# Altium PCB PCB.pcbdoc (part 1 of 2)
Units mm, origin at the board's own origin, x right, y up, seen from the top; angles counter-clockwise.
Board outline 290.83 x 119.38 mm, 2 copper layers (Top Layer, Bottom Layer); 91 components, 196 nets, 972 pads, 129 vias.
Unrouted connection lines stored in the file: 1.
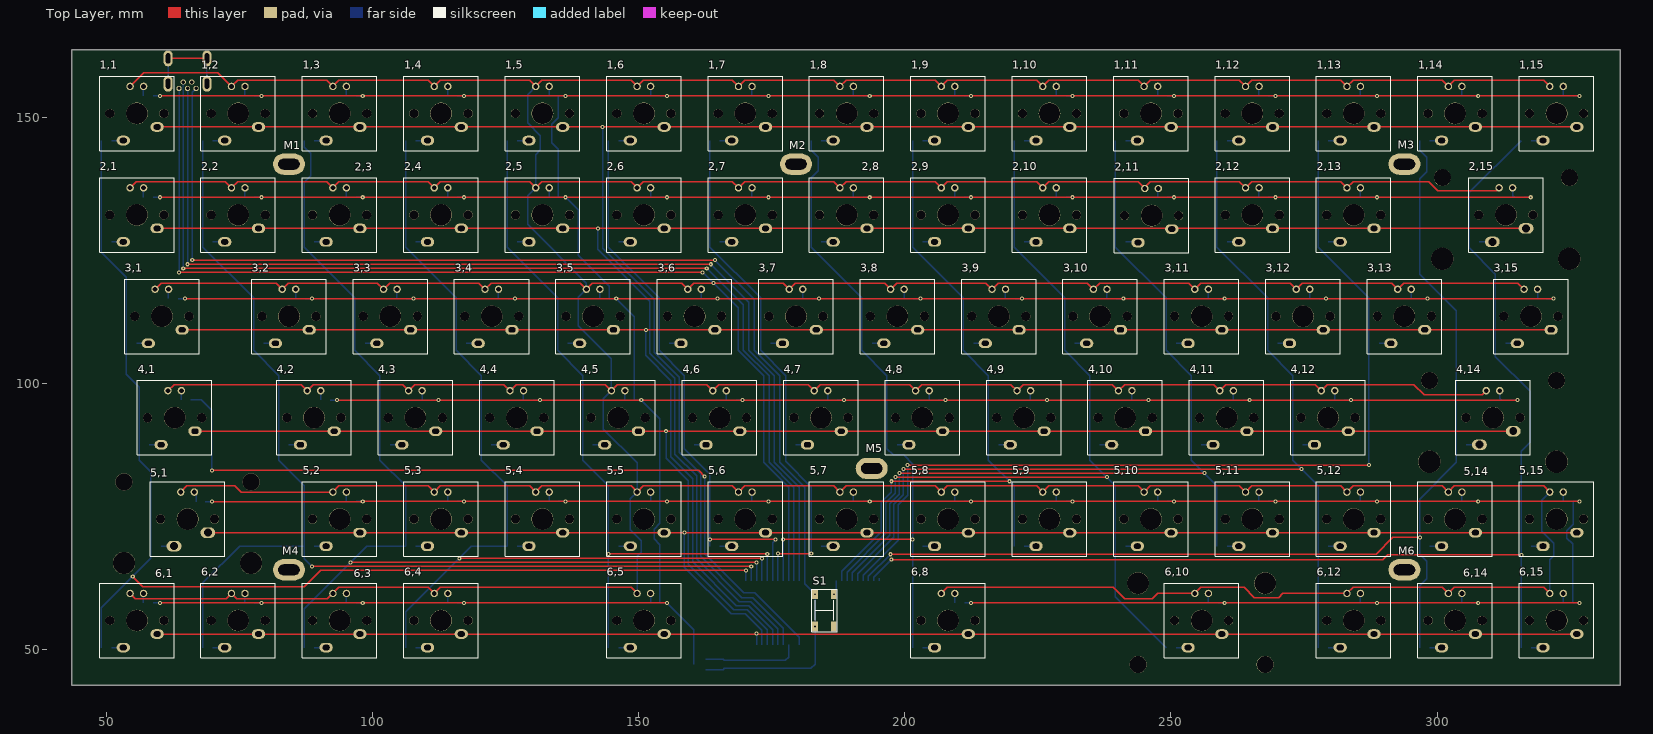
[diagram p0: Top Layer view]
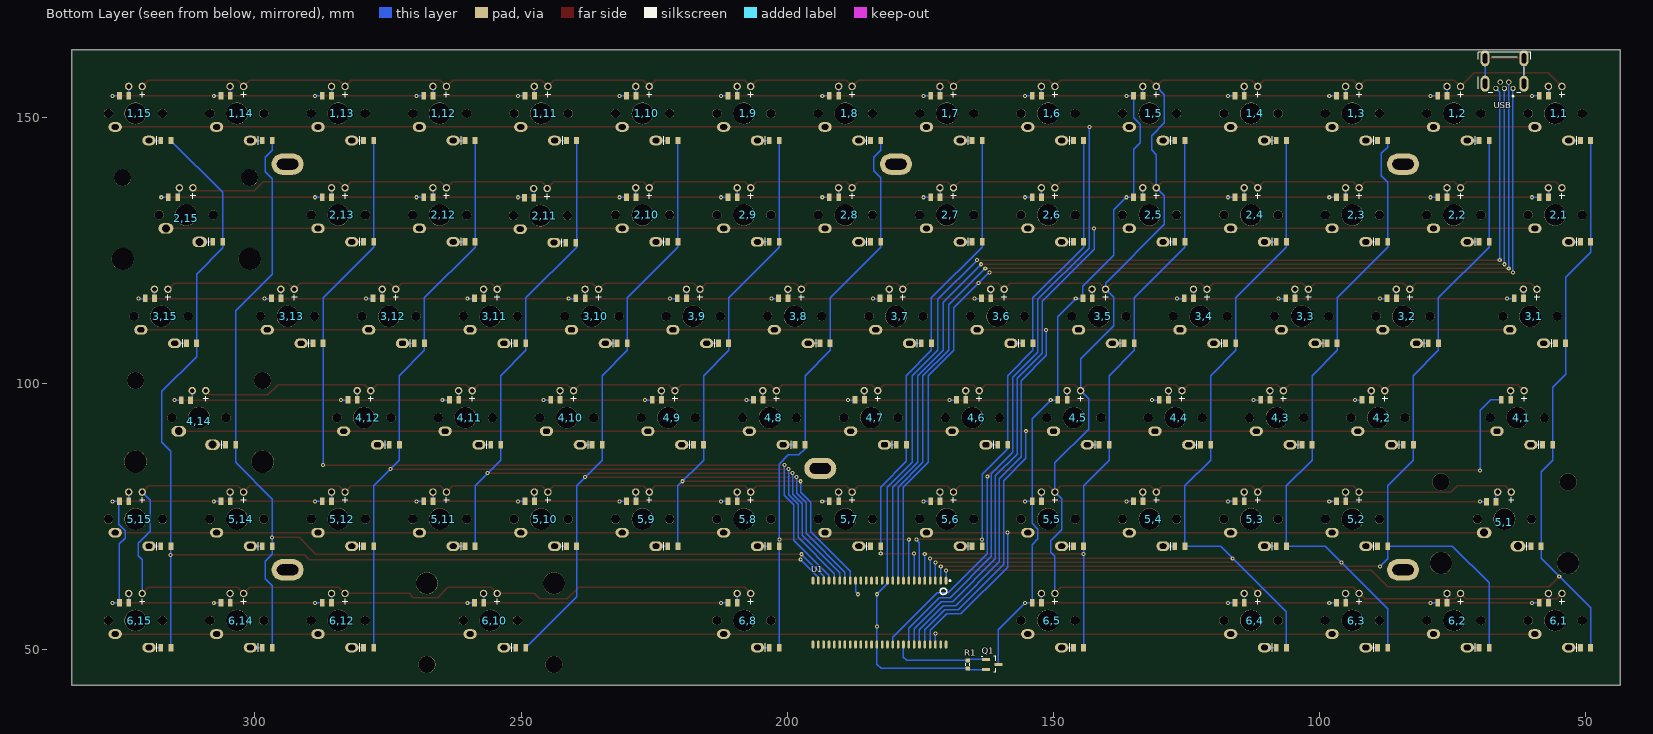
[diagram p1: Bottom Layer view, seen from below]

## Layer stack, top to bottom
Top Layer: signal copper 0.0356
Dielectric: dielectric 0.32, FR-4, Dk 4.8
Bottom Layer: signal copper 0.0356

## Board outline
43.561,162.687 43.561,43.307 334.391,43.307 334.391,162.687 43.561,162.687

## Design rules (kind name [scope] priority, off if disabled: settings)
Clearance [All] p1: gap=0.178
PolygonConnect [All] p1: connectstyle=Relief reliefconductorwidth=0.254 reliefentries=4 polygonreliefangle="90 Angle"
RoutingVias [All] p1: holewidth=0.711 width=1.27 viastyle="Through Hole" minholewidth=0.711 minwidth=1.27 maxholewidth=0.711 maxwidth=1.27
SilkscreenOverComponentPads [All] p1: minsilkscreentomaskgap=0.254
SolderMaskExpansion [All] p1: expansion=0.102
Width [All] p1: maxlimit=0.381 minlimit=0.203 preferedwidth=0.254
27 further rules are at their usual default settings.

## Components (designator, comment, footprint, x,y, rotation, side; value= is the part's Value field where it differs from the comment)
1,1 "Cherry MX Switch with diode" "Cherry MX Switch 2" 55.753,150.749 r0 top locked
1,2 "Cherry MX Switch with diode" "Cherry MX Switch 2" 74.803,150.749 r0 top locked
1,3 "Cherry MX Switch with diode" "Cherry MX Switch 2" 93.853,150.749 r0 top locked
1,4 "Cherry MX Switch with diode" "Cherry MX Switch 2" 112.903,150.749 r0 top locked
1,5 "Cherry MX Switch with diode" "Cherry MX Switch 2" 131.953,150.749 r0 top locked
1,6 "Cherry MX Switch with diode" "Cherry MX Switch 2" 151.003,150.749 r0 top locked
1,7 "Cherry MX Switch with diode" "Cherry MX Switch 2" 170.053,150.749 r0 top locked
1,8 "Cherry MX Switch with diode" "Cherry MX Switch 2" 189.103,150.749 r0 top locked
1,9 "Cherry MX Switch with diode" "Cherry MX Switch 2" 208.153,150.749 r0 top locked
1,10 "Cherry MX Switch with diode" "Cherry MX Switch 2" 227.203,150.749 r0 top locked
1,11 "Cherry MX Switch with diode" "Cherry MX Switch 2" 246.253,150.749 r0 top locked
1,12 "Cherry MX Switch with diode" "Cherry MX Switch 2" 265.303,150.749 r0 top locked
1,13 "Cherry MX Switch with diode" "Cherry MX Switch 2" 284.353,150.749 r0 top locked
1,14 "Cherry MX Switch with diode" "Cherry MX Switch 2" 303.403,150.749 r0 top locked
1,15 "Cherry MX Switch with diode" "Cherry MX Switch 2" 322.453,150.749 r0 top locked
2,1 "Cherry MX Switch with diode" "Cherry MX Switch 2" 55.753,131.699 r0 top locked
2,2 "Cherry MX Switch with diode" "Cherry MX Switch 2" 74.803,131.699 r0 top locked
2,3 "Cherry MX Switch with diode" "Cherry MX Switch 2" 93.853,131.699 r0 top locked
2,4 "Cherry MX Switch with diode" "Cherry MX Switch 2" 112.903,131.699 r0 top locked
2,5 "Cherry MX Switch with diode" "Cherry MX Switch 2" 131.953,131.699 r0 top locked
2,6 "Cherry MX Switch with diode" "Cherry MX Switch 2" 151.003,131.699 r0 top locked
2,7 "Cherry MX Switch with diode" "Cherry MX Switch 2" 170.053,131.699 r0 top locked
2,8 "Cherry MX Switch with diode" "Cherry MX Switch 2" 189.103,131.699 r0 top locked
2,9 "Cherry MX Switch with diode" "Cherry MX Switch 2" 208.153,131.699 r0 top locked
2,10 "Cherry MX Switch with diode" "Cherry MX Switch 2" 227.203,131.699 r0 top locked
2,11 "Cherry MX Switch with diode" "Cherry MX Switch 2" 246.38,131.572 r0 top locked
2,12 "Cherry MX Switch with diode" "Cherry MX Switch 2" 265.303,131.699 r0 top locked
2,13 "Cherry MX Switch with diode" "Cherry MX Switch 2" 284.353,131.699 r0 top locked
2,15 "Cherry MX Switch with diode" "Cherry MX Switch with s2" 312.928,131.699 r0 top locked
3,1 "Cherry MX Switch with diode" "Cherry MX Switch 2" 60.452,112.649 r0 top locked
3,2 "Cherry MX Switch with diode" "Cherry MX Switch 2" 84.328,112.649 r0 top locked
3,3 "Cherry MX Switch with diode" "Cherry MX Switch 2" 103.378,112.649 r0 top locked
3,4 "Cherry MX Switch with diode" "Cherry MX Switch 2" 122.428,112.649 r0 top locked
3,5 "Cherry MX Switch with diode" "Cherry MX Switch 2" 141.478,112.649 r0 top locked
3,6 "Cherry MX Switch with diode" "Cherry MX Switch 2" 160.528,112.649 r0 top locked
3,7 "Cherry MX Switch with diode" "Cherry MX Switch 2" 179.578,112.649 r0 top locked
3,8 "Cherry MX Switch with diode" "Cherry MX Switch 2" 198.628,112.649 r0 top locked
3,9 "Cherry MX Switch with diode" "Cherry MX Switch 2" 217.678,112.649 r0 top locked
3,10 "Cherry MX Switch with diode" "Cherry MX Switch 2" 236.728,112.649 r0 top locked
3,11 "Cherry MX Switch with diode" "Cherry MX Switch 2" 255.778,112.649 r0 top locked
3,12 "Cherry MX Switch with diode" "Cherry MX Switch 2" 274.828,112.649 r0 top locked
3,13 "Cherry MX Switch with diode" "Cherry MX Switch 2" 293.878,112.649 r0 top
3,15 "Cherry MX Switch with diode" "Cherry MX Switch 2" 317.627,112.649 r0 top
4,1 "Cherry MX Switch with diode" "Cherry MX Switch 2" 62.865,93.599 r0 top locked
4,2 "Cherry MX Switch with diode" "Cherry MX Switch 2" 89.027,93.599 r0 top locked
4,3 "Cherry MX Switch with diode" "Cherry MX Switch 2" 108.077,93.599 r0 top locked
4,4 "Cherry MX Switch with diode" "Cherry MX Switch 2" 127.127,93.599 r0 top locked
4,5 "Cherry MX Switch with diode" "Cherry MX Switch 2" 146.177,93.599 r0 top locked
4,6 "Cherry MX Switch with diode" "Cherry MX Switch 2" 165.227,93.599 r0 top locked
4,7 "Cherry MX Switch with diode" "Cherry MX Switch 2" 184.277,93.599 r0 top locked
4,8 "Cherry MX Switch with diode" "Cherry MX Switch 2" 203.327,93.599 r0 top locked
4,9 "Cherry MX Switch with diode" "Cherry MX Switch 2" 222.377,93.599 r0 top locked
4,10 "Cherry MX Switch with diode" "Cherry MX Switch 2" 241.427,93.599 r0 top locked
4,11 "Cherry MX Switch with diode" "Cherry MX Switch 2" 260.477,93.599 r0 top locked
4,12 "Cherry MX Switch with diode" "Cherry MX Switch 2" 279.527,93.599 r0 top locked
4,14 "Cherry MX Switch with diode" "Cherry MX Switch with s2" 310.515,93.599 r0 top locked
5,1 "Cherry MX Switch with diode" "Cherry MX Switch with s2" 65.278,74.549 r0 top locked
5,2 "Cherry MX Switch with diode" "Cherry MX Switch 2" 93.853,74.549 r0 top locked
5,3 "Cherry MX Switch with diode" "Cherry MX Switch 2" 112.903,74.549 r0 top locked
5,4 "Cherry MX Switch with diode" "Cherry MX Switch 2" 131.953,74.549 r0 top locked
5,5 "Cherry MX Switch with diode" "Cherry MX Switch 2" 151.003,74.549 r0 top locked
5,6 "Cherry MX Switch with diode" "Cherry MX Switch 2" 170.053,74.549 r0 top locked
5,7 "Cherry MX Switch with diode" "Cherry MX Switch 2" 189.103,74.549 r0 top locked
5,8 "Cherry MX Switch with diode" "Cherry MX Switch 2" 208.153,74.549 r0 top locked
5,9 "Cherry MX Switch with diode" "Cherry MX Switch 2" 227.203,74.549 r0 top locked
5,10 "Cherry MX Switch with diode" "Cherry MX Switch 2" 246.253,74.549 r0 top locked
5,11 "Cherry MX Switch with diode" "Cherry MX Switch 2" 265.303,74.549 r0 top locked
5,12 "Cherry MX Switch with diode" "Cherry MX Switch 2" 284.353,74.549 r0 top locked
5,14 "Cherry MX Switch with diode" "Cherry MX Switch 2" 303.403,74.549 r0 top locked
5,15 "Cherry MX Switch with diode" "Cherry MX Switch 2" 322.453,74.549 r0 top locked
6,1 "Cherry MX Switch with diode" "Cherry MX Switch 2" 55.753,55.499 r0 top locked
6,2 "Cherry MX Switch with diode" "Cherry MX Switch 2" 74.803,55.499 r0 top locked
6,3 "Cherry MX Switch with diode" "Cherry MX Switch 2" 93.853,55.499 r0 top locked
6,4 "Cherry MX Switch with diode" "Cherry MX Switch 2" 112.903,55.499 r0 top locked
6,5 "Cherry MX Switch with diode" "Cherry MX Switch 2" 151.003,55.499 r0 top locked
6,8 "Cherry MX Switch with diode" "Cherry MX Switch 2" 208.153,55.499 r0 top locked
6,10 "Cherry MX Switch with diode" "Cherry MX Switch 2" 255.778,55.499 r0 top locked
6,12 "Cherry MX Switch with diode" "Cherry MX Switch 2" 284.353,55.499 r0 top locked
6,14 "Cherry MX Switch with diode" "Cherry MX Switch 2" 303.403,55.499 r0 top locked
6,15 "Cherry MX Switch with diode" "Cherry MX Switch 2" 322.453,55.499 r0 top locked
M1 "M3" "M2 long" 84.328,141.224 r180 top
M2 "M3" "M2 long" 179.578,141.224 r180 top
M3 "M3" "M2 long" 293.878,141.224 r180 top
M4 "M3" "M2 long" 84.328,65.024 r180 top
M5 "M3" "M2 long" 193.802,84.074 r180 top
M6 "M3" "M2 long" 293.878,65.024 r180 top
Q1 "N7002" SOT23-2N7002 161.544,47.244 r270 bottom
R1 "Res1" RESC1608L[0603] 166.116,47.244 r270 bottom
S1 "SW-PB" "SW 4*4" 184.912,57.404 r270 top
U1 "Board_Kimera_Core" Board_Kimera_Core 170.18,62.992 r270 bottom locked
USB "USB_mini" USB_MINI 65.278,155.448 r0 bottom locked

## Footprints (in the part's own frame and the unit in brackets; to place one, negate y for a bottom-side part, rotate by r counter-clockwise, add the part's x,y. Pads: shape width x height; smd on the part's side, far side on the other; paste and mask are expansions set on the pad)
Board_Kimera_Core [mm] "Board_Kimera_Core"
  oval 1.5x0.5 smd: 1(0,0) 2(0,-1) 3(0,-2) 4(0,-3) 5(0,-4) 6(0,-5) 7(0,-6) 8(0,-7) 9(0,-8) 10(0,-9) 11(0,-10) 12(0,-11) 13(0,-12) 14(0,-13) 15(0,-14) 16(0,-15) 17(0,-16) 18(0,-17) 19(0,-18) 20(0,-19) 21(0,-20) 22(0,-21) 23(0,-22) 24(0,-23) 25(0,-24) 26(0,-25) 27(12,-25) 28(12,-24) 29(12,-23) 30(12,-22) 31(12,-21) 32(12,-20) 33(12,-19) 34(12,-17) 35(12,-18) 36(12,-16) 37(12,-15) 38(12,-14) 39(12,-13) 40(12,-12) 41(12,-11) 42(12,-10) 43(12,-9) 44(12,-8) 45(12,-7) 46(12,-6) 47(12,-5) 48(12,-4) 49(12,-3) 50(12,-2) 51(12,-1) 52(12,0)
  silkscreen extent -0.14,-1.11 2.61,0.88, body extent 0,-25.5 12,0.5, height 1
"Cherry MX Switch 2" [mm] "Cherry MX Switch"
  oval 2.5x1.8 hole 1 slot 1.3 at 0 deg: 1(3.81,-2.54) 5(-2.54,-5.08)
  rect 0.9x1.4 smd far side: 2(-6.655,-5.081) 6(-4.75,-5.081) 7(1.25,3.352) 8(3.003,3.352)
  round 1.4 hole 0.9: 3(-1.27,5.08) 4(1.27,5.08)
  round 1.727 hole 1.727: ""(-5.08,0) ""(5.08,0)
  round 4.064 hole 4.013: ""(0,0)
  silkscreen extent -7,-7 7,7, body extent -6.79,-5.81 3.23,4.07, height 1.1
"Cherry MX Switch with s2" [mil] "Cherry MX Switch with support"
  round 164.96 hole 164.96: 0(-470,-325) 0(470,-325)
  round 126 hole 126: 0(-470,275) 0(470,275)
  oval 110x78.74 hole 59: 1(150,-100) 5(-100,-200)
  rect 35.43x55.12 smd far side: 2(-271,-200) 6(-196,-200) 7(63,130) 8(132,130)
  round 55.12 hole 35.43: 3(-50,200) 4(50,200)
  round 68 hole 68: ""(-200,0) ""(200,0)
  round 160 hole 158: ""(0,0)
  silkscreen extent -276,-276 276,276, body extent -276,-229 141,158, height 43
"M2 long" [mm]
  oval 6x4 hole 2 slot 4 at 0 deg: 0(0,0)
RESC1608L[0603] [mm] "Chip Resistor, Body 1.6x0.8mm, IPC High Density"
  rect 0.7x0.9 smd: 1(-0.75,0) 2(0.75,0)
  silkscreen extent -0.2,-0.35 0.2,0.35, body extent -0.85,-0.48 0.85,0.48, height 0.6
SOT23-2N7002 [mm] "SOT23, 3-Leads, Body 2.9x1.3mm, Pitch 0.95mm, Lead Span 2.5mm, IPC Low Density"
  rect 0.6x1.5 smd: 1(-0.95,-1.107) 2(0,1.193) 3(0.95,-1.107)
  silkscreen extent -1.54,-1.94 1.5,0.69, body extent -1.5,-0.71 1.5,0.69, height 1.1
"SW 4*4" [mm] "Molded Inductor, 2-Leads, Body 12.1x11.4mm, IPC Medium Density"
  rect 1.8x1.1 smd: 1(-3.025,1.775) 2(-3.025,-1.775) 3(3.025,1.775) 4(3.025,-1.775)
  silkscreen extent -4,-2.4 4,2.4, body extent -2.37,-2.4 2.25,2.4, height 1
USB_MINI [mm]
  oval 1.7x3 hole 0.8 slot 1.9 at 90 deg: 0(-3.65,-5.65) 0(-3.65,-0.9) 0(3.65,-5.65) 0(3.65,-0.9)
  round 1 hole 0.65 paste+0: 1(-1.6,0)
  round 1 hole 0.65: 2(-0.8,-1.2) 3(0,0) 4(0.8,-1.2) 5(1.6,0)
  silkscreen extent -4.95,-6.77 4.95,1.55, body extent -4.92,-8.8 4.98,0.8, height 3.9

## Part data
Q1: library part NMOS-2, "N-Channel Power MOSFET"
R1: "Resistor"
S1: "Switch"

## Free pads (board coordinates)
  round 3.2 hole 3.15 unplated mask+0: ""(243.84,47.244) ""(267.716,47.244)
  round 4.115 hole 4.064 unplated mask+0: ""(243.84,62.484) ""(267.716,62.484)

## Via types
v1: diameter 0.762, hole 0.356, Top Layer to Bottom Layer, 129 vias

## Nets (pads, with @x,y where several pads share a name; then routed paths per layer and width w, separated by ;. In a path a pad name is that pad's centre, name@x,y a point inside that pad or via, vN(x,y) a via of type N, cw(c..) or ccw(c..) an arc to the next point about the centre after c; other vN are vias at no path point)
BL: 1,1.8 1,2.8 1,3.8 1,4.8 1,5.8 1,6.8 1,7.8 1,8.8 1,9.8 1,10.8 1,11.8 1,12.8 1,13.8 1,14.8 1,15.8 2,1.8 2,2.8 2,3.8 2,4.8 2,5.8 2,6.8 2,7.8 2,8.8 2,9.8 2,10.8 2,11.8 2,12.8 2,13.8 2,15.8 3,1.8 3,2.8 3,3.8 3,4.8 3,5.8 3,6.8 3,7.8 3,8.8 3,9.8 3,10.8 3,11.8 3,12.8 3,13.8 3,15.8 4,2.8 4,3.8 4,4.8 4,5.8 4,6.8 4,7.8 4,8.8 4,9.8 4,10.8 4,11.8 4,12.8 4,14.8 5,1.8 5,2.8 5,3.8 5,4.8 5,5.8 5,6.8 5,7.8 5,8.8 5,9.8 5,10.8 5,11.8 5,12.8 5,14.8 5,15.8 6,1.8 6,2.8 6,3.8 6,4.8 6,5.8 6,8.8 6,10.8 6,12.8 6,14.8 6,15.8 Q1.2 | length 1704
  Top Layer w0.254: v1(60.092,58.814) v1(79.142,58.814) v1(98.192,58.814) v1(117.242,58.814) v1(155.342,58.814) ; v1(60.092,135.014) v1(79.142,135.014) v1(98.192,135.014) v1(117.242,135.014) v1(136.292,135.014) v1(155.342,135.014) v1(174.392,135.014) v1(193.442,135.014) v1(212.492,135.014) v1(231.542,135.014) v1(250.592,135.014) v1(269.642,135.014) v1(288.692,135.014) v1(317.614,135.014) ; v1(60.092,154.064) v1(79.142,154.064) v1(98.192,154.064) v1(117.242,154.064) v1(136.292,154.064) v1(155.342,154.064) v1(174.392,154.064) v1(193.442,154.064) v1(212.492,154.064) v1(231.542,154.064) v1(250.592,154.064) v1(269.642,154.064) v1(288.692,154.064) v1(307.742,154.064) v1(326.792,154.064) ; v1(64.791,115.964) v1(88.667,115.964) v1(107.717,115.964) v1(126.767,115.964) v1(145.817,115.964) v1(164.867,115.964) v1(183.917,115.964) v1(202.967,115.964) v1(222.017,115.964) v1(241.067,115.964) v1(260.117,115.964) v1(279.167,115.964) v1(298.217,115.964) v1(321.865,115.964) ; v1(69.866,77.851) v1@98.179,77.851 ; v1(93.366,96.914) v1(112.416,96.914) v1(131.466,96.914) v1(150.516,96.914) v1(169.566,96.914) v1(188.616,96.914) v1(207.666,96.914) v1(226.716,96.914) v1(245.766,96.914) v1(264.816,96.914) v1(283.866,96.914) 302.916,96.914 v1(315.103,96.914) ; v1(98.192,77.864) v1(117.242,77.864) v1(136.292,77.864) v1(155.342,77.864) v1(174.392,77.864) v1(193.442,77.864) v1(212.492,77.864) v1(231.542,77.864) v1(250.592,77.864) v1(269.642,77.864) v1(288.692,77.864) v1(307.742,77.864) v1(326.792,77.864) ; v1(212.492,58.814) v1(260.117,58.814) v1(288.692,58.814) v1(307.742,58.814) v1(326.792,58.814)
  Bottom Layer w0.254: 58.857,58.814 v1(60.092,58.814) ; 58.857,135.014 v1(60.092,135.014) ; 58.857,154.064 v1(60.092,154.064) ; 63.556,115.964 v1(64.791,115.964) ; 68.631,77.851 v1(69.866,77.851) ; 77.907,58.814 v1(79.142,58.814) ; 77.907,135.014 v1(79.142,135.014) ; 77.907,154.064 v1(79.142,154.064) ; 87.432,115.964 v1(88.667,115.964) ; 92.131,96.914 v1(93.366,96.914) ; 96.957,58.814 v1(98.192,58.814) ; 96.957,77.864 v1(98.192,77.864) ; 96.957,135.014 v1(98.192,135.014) ; 96.957,154.064 v1(98.192,154.064) ; 106.482,115.964 v1(107.717,115.964) ; 111.181,96.914 v1(112.416,96.914) ; 116.007,58.814 v1(117.242,58.814) ; 116.007,77.864 v1(117.242,77.864) ; 116.007,135.014 v1(117.242,135.014) ; 116.007,154.064 v1(117.242,154.064) ; 125.532,115.964 v1(126.767,115.964) ; 130.231,96.914 v1(131.466,96.914) ; 134.956,135.051 134.956,144.063 133.731,145.288 133.731,148.717 134.956,149.942 134.956,154.101 ; 135.057,77.864 v1(136.292,77.864) ; 135.057,135.014 v1(136.292,135.014) 138.684,132.622 138.684,124.079 144.481,118.282 144.481,116.001 ; 135.057,154.064 v1(136.292,154.064) ; 144.582,115.964 v1(145.817,115.964) 149.18,112.602 149.18,96.951 ; 149.281,96.914 v1(150.516,96.914) 154.006,93.425 154.006,77.901 154.006,73.742 152.908,72.644 152.908,70.866 154.006,69.768 154.006,58.851 ; 154.107,58.814 v1(155.342,58.814) 160.351,53.805 Q1.2@160.351,47.244 ; 154.107,77.864 v1(155.342,77.864) ; 154.107,135.014 v1(155.342,135.014) ; 154.107,154.064 v1(155.342,154.064) ; 163.632,115.964 v1(164.867,115.964) ; 168.331,96.914 v1(169.566,96.914) ; 173.157,77.864 v1(174.392,77.864) ; 173.157,135.014 v1(174.392,135.014) ; 173.157,154.064 v1(174.392,154.064) ; 182.682,115.964 v1(183.917,115.964) ; 187.381,96.914 v1(188.616,96.914) ; 192.207,77.864 v1(193.442,77.864) ; 192.207,135.014 v1(193.442,135.014) ; 192.207,154.064 v1(193.442,154.064) ; 201.732,115.964 v1(202.967,115.964) ; 206.431,96.914 v1(207.666,96.914) ; 211.257,58.814 v1(212.492,58.814) ; 211.257,77.864 v1(212.492,77.864) ; 211.257,135.014 v1(212.492,135.014) ; 211.257,154.064 v1(212.492,154.064) ; 220.782,115.964 v1(222.017,115.964) ; 225.481,96.914 v1(226.716,96.914) ; 230.307,77.864 v1(231.542,77.864) ; 230.307,135.014 v1(231.542,135.014) ; 230.307,154.064 v1(231.542,154.064) ; 239.832,115.964 v1(241.067,115.964) ; 244.531,96.914 v1(245.766,96.914) ; 249.357,77.864 v1(250.592,77.864) ; 249.357,135.014 v1(250.592,135.014) ; 249.357,154.064 v1(250.592,154.064) ; 258.882,58.814 v1(260.117,58.814) ; 258.882,115.964 v1(260.117,115.964) ; 263.581,96.914 v1(264.816,96.914) ; 268.407,77.864 v1(269.642,77.864) ; 268.407,135.014 v1(269.642,135.014) ; 268.407,154.064 v1(269.642,154.064) ; 277.932,115.964 v1(279.167,115.964) ; 282.631,96.914 v1(283.866,96.914) ; 287.457,58.814 v1(288.692,58.814) ; 287.457,77.864 v1(288.692,77.864) ; 287.457,135.014 v1(288.692,135.014) ; 287.457,154.064 v1(288.692,154.064) ; 296.982,115.964 v1(298.217,115.964) ; 306.507,58.814 v1(307.742,58.814) ; 306.507,77.864 v1(307.742,77.864) ; 306.507,154.064 v1(307.742,154.064) ; 313.868,96.914 v1(315.103,96.914) ; 316.378,135.014 v1(317.614,135.014) ; 320.63,115.964 v1(321.865,115.964) ; 325.456,58.851 325.456,69.895 324.358,70.993 324.358,72.39 325.557,73.589 325.557,77.864 v1(326.792,77.864) ; 325.557,58.814 v1(326.792,58.814) ; 325.557,154.064 v1(326.792,154.064)
CAPLED: 4,1.8 U1.42 | length 149.3
  Top Layer w0.254: v1(69.85,83.693) 161.29,83.693 v1(162.433,82.55)
  Bottom Layer w0.254: 65.868,96.951 67.895,96.951 69.85,94.996 v1(69.85,83.693) ; v1(162.433,82.55) 162.433,68.072 169.799,60.706 171.831,60.706 180.18,52.357 U1.42@180.18,50.992
D_N: U1.10 USB.2 | length 198.8
  Top Layer w0.254: v1(64.478,121.666) v1(162.814,121.666)
  Bottom Layer w0.229: 64.478,155.105 64.478,155.894
  Bottom Layer w0.254: v1(64.478,121.666) 64.478,155.105 ; 64.478,155.894 USB.2@64.478,156.648 ; v1(162.814,121.666) 169.704,114.776 169.704,106.299 174.53,101.473 174.53,85.217 179.18,80.567 U1.10@179.18,62.992
D_P: U1.11 USB.3 | length 197.6
  Top Layer w0.254: v1(65.278,122.428) v1(163.576,122.428)
  Bottom Layer w0.254: v1(65.278,122.428) USB.3@65.278,155.448 ; v1(163.576,122.428) 170.704,115.3 170.704,106.299 175.53,101.473 175.53,85.217 180.18,80.567 U1.11@180.18,62.992
GND: Q1.3 R1.2 S1.2 S1.4 U1.12 U1.39 USB.5 | length 235.4
  Top Layer w0.254: v1(66.167,123.19) v1(164.338,123.19)
  Bottom Layer w0.254: v1(66.167,123.19) 66.167,154.737 USB.5@66.878,155.448 ; Q1.3@162.651,46.294 165.916,46.294 R1.2@166.116,46.494 182.384,46.494 183.18,47.29 U1.39@183.18,50.992 183.18,60.386 181.18,62.386 U1.12@181.18,62.992 181.18,80.567 176.53,85.217 176.53,101.473 171.704,106.299 171.704,115.824 v1(164.338,123.19)
  other v1: 183.137,54.379 183.137,60.429
HANG1: 1,1.1 1,2.1 1,3.1 1,4.1 1,5.1 1,6.1 1,7.1 1,8.1 1,9.1 1,10.1 1,11.1 1,12.1 1,13.1 1,14.1 1,15.1 U1.45 | length 379.2
  Top Layer w0.254: 59.563,148.209 78.613,148.209 97.663,148.209 116.713,148.209 135.763,148.209 154.813,148.209 173.863,148.209 192.913,148.209 211.963,148.209 231.013,148.209 250.063,148.209 269.113,148.209 288.163,148.209 307.213,148.209 326.263,148.209
  Bottom Layer w0.254: v1(143.256,148.209) 143.256,125.476 152.908,115.824 152.908,105.918 157.607,101.219 157.607,87.122 161.671,83.058 161.671,67.564 169.418,59.817 171.45,59.817 177.18,54.087 U1.45@177.18,50.992
HANG2: 2,1.1 2,2.1 2,3.1 2,4.1 2,5.1 2,6.1 2,7.1 2,8.1 2,9.1 2,10.1 2,11.1 2,12.1 2,13.1 2,15.1 U1.46 | length 350.6
  Top Layer w0.254: 59.563,129.159 78.613,129.159 97.663,129.159 116.713,129.159 135.763,129.159 154.813,129.159 173.863,129.159 192.913,129.159 211.963,129.159 231.013,129.159 250.063,129.159 269.113,129.159 288.163,129.159 316.738,129.159
  Bottom Layer w0.254: v1(142.367,129.159) 142.367,125.222 152.146,115.443 152.146,105.664 156.845,100.965 156.845,86.741 160.909,82.677 160.909,67.056 168.91,59.055 171.069,59.055 176.18,53.944 U1.46@176.18,50.992
HANG3: 3,1.1 3,2.1 3,3.1 3,4.1 3,5.1 3,6.1 3,7.1 3,8.1 3,9.1 3,10.1 3,11.1 3,12.1 3,13.1 3,15.1 U1.47 | length 327.5
  Top Layer w0.254: 64.262,110.109 88.138,110.109 107.188,110.109 126.238,110.109 145.288,110.109 164.338,110.109 183.388,110.109 202.438,110.109 221.488,110.109 240.538,110.109 259.588,110.109 278.638,110.109 297.688,110.109 321.437,110.109
  Bottom Layer w0.254: v1(151.384,110.109) 151.384,105.283 156.083,100.584 156.083,86.233 160.147,82.169 160.147,66.548 168.402,58.293 170.688,58.293 175.18,53.801 U1.47@175.18,50.992
HANG4: 4,1.1 4,2.1 4,3.1 4,4.1 4,5.1 4,6.1 4,7.1 4,8.1 4,9.1 4,10.1 4,11.1 4,12.1 4,14.1 U1.48 | length 297.1
  Top Layer w0.254: 66.675,91.059 92.837,91.059 111.887,91.059 130.937,91.059 149.987,91.059 169.037,91.059 188.087,91.059 207.137,91.059 226.187,91.059 245.237,91.059 264.287,91.059 283.337,91.059 314.325,91.059
  Bottom Layer w0.254: v1(155.194,91.059) 155.194,85.979 159.385,81.788 159.385,66.04 167.894,57.531 170.434,57.531 174.18,53.785 U1.48@174.18,50.992
HANG5: 5,1.1 5,2.1 5,3.1 5,4.1 5,5.1 5,6.1 5,7.1 5,8.1 5,9.1 5,10.1 5,11.1 5,12.1 5,14.1 5,15.1 U1.49 | length 285.8
  Top Layer w0.254: 69.088,72.009 97.663,72.009 116.713,72.009 135.763,72.009 154.813,72.009 173.863,72.009 192.913,72.009 211.963,72.009 231.013,72.009 250.063,72.009 269.113,72.009 288.163,72.009 307.213,72.009 326.263,72.009
  Bottom Layer w0.254: v1(158.623,72.009) 158.623,65.532 167.386,56.769 170.053,56.769 173.18,53.642 U1.49@173.18,50.992
HANG6: 6,1.1 6,2.1 6,3.1 6,4.1 6,5.1 6,8.1 6,10.1 6,12.1 6,14.1 6,15.1 U1.50 | length 268.8
  Top Layer w0.254: 59.563,52.959 78.613,52.959 97.663,52.959 116.713,52.959 154.813,52.959 211.963,52.959 259.588,52.959 288.163,52.959 307.213,52.959 326.263,52.959
  Bottom Layer w0.254: U1.50@172.18,50.992 v1(172.18,53.054)
LED: 1,1.3 1,2.3 1,3.3 1,4.3 1,5.3 1,6.3 1,7.3 1,8.3 1,9.3 1,10.3 1,11.3 1,12.3 1,13.3 1,14.3 1,15.3 2,1.3 2,2.3 2,3.3 2,4.3 2,5.3 2,6.3 2,7.3 2,8.3 2,9.3 2,10.3 2,11.3 2,12.3 2,13.3 2,15.3 3,1.3 3,2.3 3,3.3 3,4.3 3,5.3 3,6.3 3,7.3 3,8.3 3,9.3 3,10.3 3,11.3 3,12.3 3,13.3 3,15.3 4,1.3 4,2.3 4,3.3 4,4.3 4,5.3 4,6.3 4,7.3 4,8.3 4,9.3 4,10.3 4,11.3 4,12.3 4,14.3 5,1.3 5,2.3 5,3.3 5,4.3 5,5.3 5,6.3 5,7.3 5,8.3 5,9.3 5,10.3 5,11.3 5,12.3 5,14.3 5,15.3 6,1.3 6,2.3 6,3.3 6,4.3 6,5.3 6,8.3 6,10.3 6,12.3 6,14.3 6,15.3 U1.9 USB.1 | length 1897.1
  Top Layer w0.254: 54.483,60.579 55.499,59.563 72.517,59.563 73.533,60.579 74.549,59.563 91.567,59.563 92.583,60.579 93.726,61.722 110.49,61.722 111.633,60.579 112.776,61.722 148.59,61.722 149.733,60.579 ; 54.483,136.779 55.626,137.922 72.39,137.922 73.533,136.779 74.676,137.922 91.44,137.922 92.583,136.779 93.726,137.922 110.49,137.922 111.633,136.779 112.776,137.922 129.54,137.922 130.683,136.779 131.826,137.922 148.59,137.922 149.733,136.779 150.876,137.922 167.64,137.922 168.783,136.779 169.926,137.922 186.69,137.922 187.833,136.779 188.976,137.922 205.74,137.922 206.883,136.779 208.026,137.922 224.79,137.922 225.933,136.779 227.076,137.922 243.84,137.922 244.983,136.779 246.126,137.922 262.89,137.922 264.033,136.779 265.176,137.922 281.94,137.922 283.083,136.779 284.226,137.922 298.45,137.922 300.101,136.271 311.15,136.271 311.658,136.779 ; 54.483,155.829 57.023,158.369 70.993,158.369 73.533,155.829 74.676,156.972 91.44,156.972 92.583,155.829 93.726,156.972 110.49,156.972 111.633,155.829 112.776,156.972 129.54,156.972 130.683,155.829 131.826,156.972 148.59,156.972 149.733,155.829 150.876,156.972 167.64,156.972 168.783,155.829 169.926,156.972 186.69,156.972 187.833,155.829 188.976,156.972 205.74,156.972 206.883,155.829 208.026,156.972 224.79,156.972 225.933,155.829 227.076,156.972 243.84,156.972 244.983,155.829 246.126,156.972 262.89,156.972 264.033,155.829 265.176,156.972 281.94,156.972 283.083,155.829 284.226,156.972 300.99,156.972 302.133,155.829 303.276,156.972 320.04,156.972 321.183,155.829 ; 59.182,117.729 60.325,118.872 81.915,118.872 83.058,117.729 84.201,118.872 100.965,118.872 102.108,117.729 103.251,118.872 120.015,118.872 121.158,117.729 122.301,118.872 139.065,118.872 140.208,117.729 141.351,118.872 158.115,118.872 159.258,117.729 160.401,118.872 177.165,118.872 178.308,117.729 179.451,118.872 196.215,118.872 197.358,117.729 198.501,118.872 215.265,118.872 216.408,117.729 217.551,118.872 234.315,118.872 235.458,117.729 236.601,118.872 253.365,118.872 254.508,117.729 255.651,118.872 272.415,118.872 273.558,117.729 274.701,118.872 291.465,118.872 292.608,117.729 293.751,118.872 315.214,118.872 316.357,117.729 ; 61.595,98.679 62.738,99.822 86.614,99.822 87.757,98.679 88.9,99.822 105.664,99.822 106.807,98.679 107.95,99.822 124.714,99.822 125.857,98.679 127,99.822 143.764,99.822 144.907,98.679 146.05,99.822 162.814,99.822 163.957,98.679 165.1,99.822 181.864,99.822 183.007,98.679 184.15,99.822 200.914,99.822 202.057,98.679 203.2,99.822 219.964,99.822 221.107,98.679 222.25,99.822 239.014,99.822 240.157,98.679 241.3,99.822 258.064,99.822 259.207,98.679 260.35,99.822 277.114,99.822 278.257,98.679 279.4,99.822 295.656,99.822 297.561,97.917 308.483,97.917 309.245,98.679 ; v1(63.678,120.904) v1(162.052,120.904) ; 64.008,79.629 65.151,80.772 74.168,80.772 75.387,79.553 92.507,79.553 92.583,79.629 93.726,80.772 110.49,80.772 111.633,79.629 112.776,80.772 129.54,80.772 130.683,79.629 131.826,80.772 148.59,80.772 149.733,79.629 150.876,80.772 167.64,80.772 168.783,79.629 169.926,80.772 186.69,80.772 187.833,79.629 188.976,80.772 205.74,80.772 206.883,79.629 208.026,80.772 224.79,80.772 225.933,79.629 227.076,80.772 243.84,80.772 244.983,79.629 246.126,80.772 262.89,80.772 264.033,79.629 265.176,80.772 281.94,80.772 283.083,79.629 284.226,80.772 300.99,80.772 302.133,79.629 303.276,80.772 320.04,80.772 321.183,79.629 ; 206.883,60.579 208.026,61.722 239.141,61.722 241.3,59.563 246.507,59.563 247.523,60.579 254.508,60.579 255.651,61.722 263.779,61.722 265.684,59.817 270.256,59.817 271.018,60.579 283.083,60.579 284.226,61.722 300.99,61.722 302.133,60.579 303.276,61.722 320.04,61.722 321.183,60.579
  Bottom Layer w0.254: v1(63.678,120.904) USB.1@63.678,155.448 ; 130.683,155.829 129.159,154.305 129.159,148.971 131.572,146.558 131.572,143.891 130.683,143.002 130.683,136.779 129.159,135.255 129.159,129.921 140.208,118.872 140.208,117.729 138.684,116.205 138.684,110.871 144.907,104.648 144.907,98.679 143.383,97.155 143.383,91.44 149.733,85.09 149.733,79.629 148.463,78.359 148.463,72.517 150.495,70.485 150.495,68.326 149.733,67.564 149.733,60.579 ; v1(162.052,120.904) 168.704,114.252 168.704,106.299 173.53,101.473 173.53,85.217 178.18,80.567 U1.9@178.18,62.992 ; 321.183,60.579 321.183,66.929 321.945,67.691 321.945,69.977 319.659,72.263 319.659,78.105 321.183,79.629
  other v1: 164.084,118.872
LIE1: 1,1.2 2,1.2 3,1.2 4,1.2 5,1.2 6,1.2 U1.1 | length 222.1
  Top Layer w0.254: v1(54.991,63.754) 56.896,61.849 87.249,61.849 90.297,64.897 v1(170.18,64.897)
  Bottom Layer w0.254: 49.098,50.418 49.098,57.861 58.395,67.158 58.395,69.469 58.395,83.464 56.21,85.649 56.21,88.518 56.21,99.365 53.797,101.778 53.797,107.568 53.797,119.939 49.098,124.638 49.098,126.618 49.098,145.668 ; U1.1@170.18,62.992 v1(170.18,64.897)
LIE2: 1,2.2 2,2.2 3,2.2 4,2.2 5,2.2 6,2.2 U1.2 | length 208
  Top Layer w0.254: v1@88.392,65.659 v1(171.18,65.659)
  Bottom Layer w0.254: 68.148,50.418 68.148,62.56 75.056,69.468 87.198,69.468 ; 68.148,145.668 68.148,126.618 68.148,125.654 77.673,116.129 77.673,107.568 77.673,106.223 82.372,101.524 82.372,88.518 82.372,85.649 87.198,80.823 87.198,69.468 ; v1(88.646,65.659) 87.198,67.107 87.198,69.468 ; U1.2@171.18,62.992 v1(171.18,65.659)
LIE3: 1,3.2 2,3.2 3,3.2 4,3.2 5,3.2 6,3.2 U1.3 | length 196
  Top Layer w0.254: v1(95.885,66.421) v1(172.18,66.421)
  Bottom Layer w0.254: 87.198,50.418 87.198,57.734 98.932,69.468 106.248,69.468 106.248,80.823 101.422,85.649 101.422,88.518 101.422,101.524 96.723,106.223 96.723,107.568 96.723,116.129 87.198,125.654 87.198,126.618 87.198,137.871 88.392,139.065 88.392,143.256 87.198,144.45 87.198,145.668 ; U1.3@172.18,62.992 v1(172.18,66.421)